# Allegro board hfplink.brd
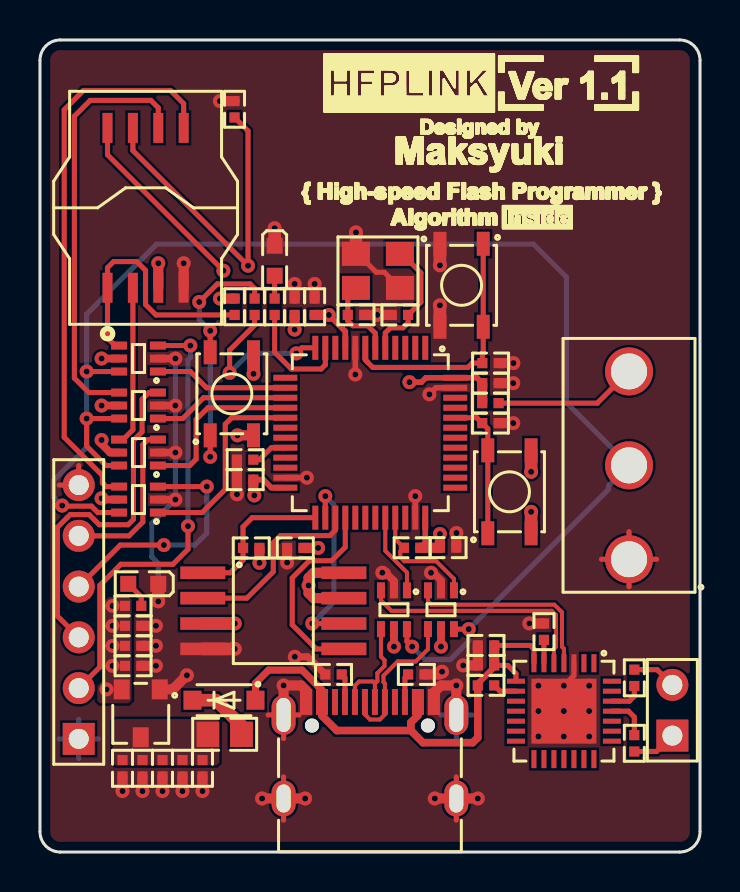
[diagram p0: board, top side]
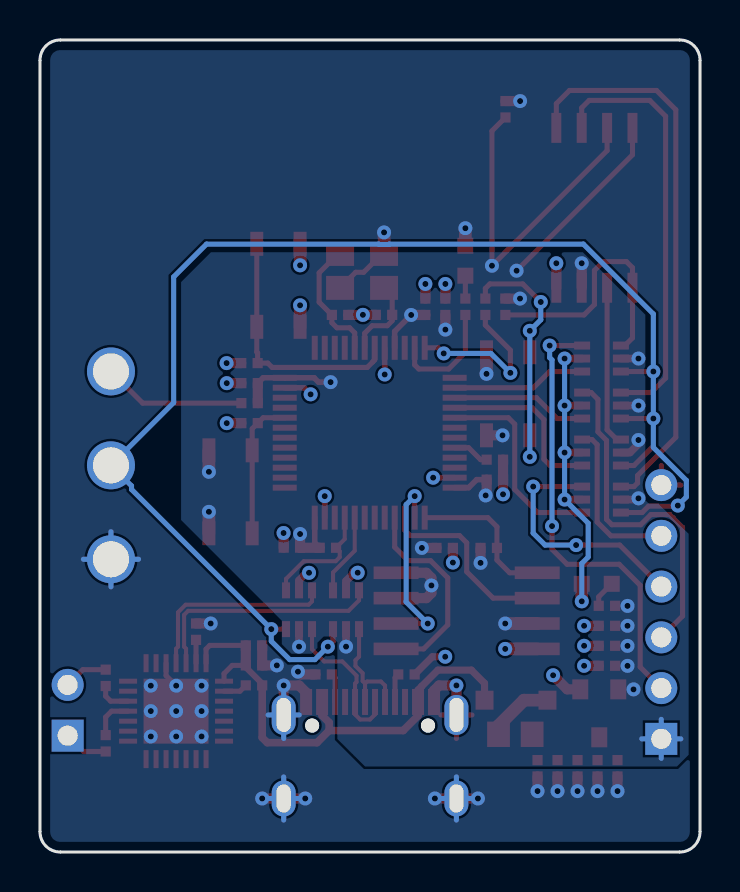
[diagram p1: board, bottom side, seen from below]

Outline 33.02 x 40.64 mm; copper layers: TOP, BOTTOM. Coordinates in mm from the lower left corner of the outline.
Outline path: 0,39.62 0,1.02 arc(0.3,0.3) 1.02,0 32,0 arc(32.72,0.3) 33.02,1.02 33.02,39.62 arc(32.72,40.34) 32,40.64 1.02,40.64 arc(0.3,40.34) 0,39.62

## Design rules (mm)
net group ALL_DP: nets DN DP
net group UART_DP: nets UART_DN UART_DP
net group USB_DP: nets USB_DN USB_DP

## Placement (name value [footprint] x y rotation side)
C1  100nF  [C0402]  22.53 23.47 180 top
C2  10pF  [C0402]  18.01 26.88 180 top
C3  100nF  [C0402]  20.42 15.23 180 top
C4  100nF  [C0402]  22.31 10.34 180 top
C5  1uF  [C0402]  22.31 9.34 180 top
C6  10pF  [C0402]  15.81 26.88 0 top
C7  4.7uF  [C0402]  13.74 27.29 270 top
C8  10uF  [C0402]  7.13 4.19 270 top
C9  10uF  [C0402]  8.13 4.19 270 top
C10  100nF  [C0402]  5.13 4.19 270 top
C11  100nF  [C0402]  6.13 4.19 270 top
C12  100nF  [C0402]  12.74 27.29 90 top
C13  100nF  [C0402]  25.21 11.03 90 top
C14  100nF  [C0402]  10.26 18.64 0 top
C15  10uF  [C0402]  4.13 4.19 270 top
C16  10uF  [C0402]  4.66 9.32 0 top
C17  10uF  [C0402]  4.66 10.32 0 top
C18  100nF  [C0402]  4.66 11.32 0 top
C19  100nF  [C0402]  9.73 37.17 90 top
C20  100nF  [C0402]  12.77 15.22 180 top
C21  100nF  [C0402]  22.54 24.47 0 top
D1  1N5819  [SOD-123-0R95X0R90]  9.21 7.6 180 top
F1  0805L110SLYR_005  [L0805]  9.24 5.89 180 top
J1  USB_TYPEC  [USB-TYPEC-12-SM]  16.51 5.09 0 top
J2  UART  [HDR2X1-2R54-TM-VM]  31.64 5.82 90 top
J3  USER_FLASH  [HDR6X1-2R54-TM-VM]  1.94 5.66 90 top
J4  ACA-SPI-004-K02  [ACA-SPI-004-K02-SM]  5.28 32.24 180 top
LED1  BLUE  [LED0603]  11.74 29.59 270 top
LED2  RED  [LED0603]  5.17 13.42 180 top
R1  5.1K  [R0402]  14.69 8.89 0 top
R2  5.1K  [R0402]  18.83 8.89 0 top
R3  1.5K  [R0402]  18.62 15.23 0 top
R4  0R  [R0402]  29.73 5.44 270 top
R5  0R  [R0402]  29.73 8.72 90 top
R6  2K  [R0402]  11.74 27.29 270 top
R7  4.7K  [R0402]  22.31 8.34 0 top
R8  2K  [R0402]  4.66 12.32 0 top
R9  10K  [R0402]  10.26 19.64 180 top
R10  2K  [R0402]  22.53 22.47 0 top
R11  10K  [R0402]  9.74 27.29 270 top
R12  10K  [R0402]  10.57 15.22 180 top
R13  10K  [R0402]  22.53 21.46 0 top
R14  330R  [R0402]  10.74 27.29 90 top
SW1  STATE-SWITCH  [SW-3-12R7X6R6]  29.47 19.35 180 top
SW2  RESET  [SW-4-1R20X0R65-SM]  21.09 28.36 270 top
SW3  BOOT  [SW-4-1R20X0R65-SM]  23.49 18.03 90 top
SW4  USER  [SW-4-1R20X0R65-SM]  9.6 22.93 90 top
U1  CP2102  [QFN-28-0R90X0R25]  26.21 7.05 270 top
U2  STM/CH32V103C8T6  [LQFP-48-1R20X0R30]  16.52 20.98 180 top
U3  XC6206P332MR  [SOT-23-3-1R00X0R80]  5.04 6.94 270 top
U4  W25Q128JVSIQ  [SOIC-8-2R25X0R63]  11.67 12.07 270 top
U5  WAS3157B  [SOT-363-6-0R80X0R40]  20.06 12.13 180 top
U6  WAS3157B  [SOT-363-6-0R80X0R40]  17.71 12.13 180 top
U7  WAS3157B  [SOT-363-6-0R80X0R40]  4.93 24.7 90 top
U8  WAS3157B  [SOT-363-6-0R80X0R40]  4.93 22.34 90 top
U9  WAS3157B  [SOT-363-6-0R80X0R40]  4.93 17.64 90 top
U10  WAS3157B  [SOT-363-6-0R80X0R40]  4.93 19.99 90 top
X1  8MHz 10pF 10ppm  [XTAL-4-3R20X2R50-SM]  16.91 29.08 180 top

## Library data of the parts
C1-C21 = CAPACITOR-NON-POL
D1 = 1N5819
F1 = FUSE
J1 = USB_TYPEC
J2 = HEADER-2X1
J3 = HEADER-6X1
J4 = ACA-SPI-004-K02
LED1 LED2 = LED
R1-R14 = RESISTOR
SW1 = SW-SLIDE-SPDT
SW2-SW4 = SW-KEY-4
U1 = CP2102
U2 = STM/CH32F103C8T6
U3 = XC6206P332MR
U4 = W25Q128JVSIQ
U5-U10 = WAS3157B
X1 = XTAL-CRY-4

## Footprints (pads in the part's own frame, mm; a bottom-side part is the same pattern mirrored in y, then rotated)
ACA-SPI-004-K02-SM
  rect 0.5x1.5 smd: 1(1.905,4) 2(0.635,4) 3(-0.635,4) 4(-1.905,4) 5(-1.905,-4) 6(-0.635,-4) 7(0.635,-4) 8(1.905,-4)
C0402
  rect 0.51x0.51 smd: 1(-0.41,0) 2(0.41,0)
HDR2X1-2R54-TM-VM
  rect 1.6x1.6 hole 1: 1(0,0)
  round 1.6 hole 1: 2(2.54,0)
HDR6X1-2R54-TM-VM
  rect 1.6x1.6 hole 1: 1(0,0)
  round 1.6 hole 1: 2(2.54,0) 3(5.08,0) 4(7.62,0) 5(10.16,0) 6(12.7,0)
L0805
  rect 1.14x1.27 smd: 1(-0.84,0) 2(0.84,0)
LED0603
  rect 0.8x0.8 smd: 1(0.75,0) 2(-0.75,0)
LQFP-48-1R20X0R30
  rect 0.3x1.2 smd: 1(-2.75,-4.25) 2(-2.25,-4.25) 3(-1.75,-4.25) 4(-1.25,-4.25) 5(-0.75,-4.25) 6(-0.25,-4.25) 7(0.25,-4.25) 8(0.75,-4.25) 9(1.25,-4.25) 10(1.75,-4.25) 11(2.25,-4.25) 12(2.75,-4.25) 25(2.75,4.25) 26(2.25,4.25) 27(1.75,4.25) 28(1.25,4.25) 29(0.75,4.25) 30(0.25,4.25) 31(-0.25,4.25) 32(-0.75,4.25) 33(-1.25,4.25) 34(-1.75,4.25) 35(-2.25,4.25) 36(-2.75,4.25)
  rect 1.2x0.3 smd: 13(4.25,-2.75) 14(4.25,-2.25) 15(4.25,-1.75) 16(4.25,-1.25) 17(4.25,-0.75) 18(4.25,-0.25) 19(4.25,0.25) 20(4.25,0.75) 21(4.25,1.25) 22(4.25,1.75) 23(4.25,2.25) 24(4.25,2.75) 37(-4.25,2.75) 38(-4.25,2.25) 39(-4.25,1.75) 40(-4.25,1.25) 41(-4.25,0.75) 42(-4.25,0.25) 43(-4.25,-0.25) 44(-4.25,-0.75) 45(-4.25,-1.25) 46(-4.25,-1.75) 47(-4.25,-2.25) 48(-4.25,-2.75)
QFN-28-0R90X0R25
  rect 0.9x0.25 smd: 1(-2.4,1.5) 2(-2.4,1) 3(-2.4,0.5) 4(-2.4,0) 5(-2.4,-0.5) 6(-2.4,-1) 7(-2.4,-1.5) 15(2.4,-1.5) 16(2.4,-1) 17(2.4,-0.5) 18(2.4,0) 19(2.4,0.5) 20(2.4,1) 21(2.4,1.5)
  rect 0.25x0.9 smd: 8(-1.5,-2.4) 9(-1,-2.4) 10(-0.5,-2.4) 11(0,-2.4) 12(0.5,-2.4) 13(1,-2.4) 14(1.5,-2.4) 22(1.5,2.4) 23(1,2.4) 24(0.5,2.4) 25(0,2.4) 26(-0.5,2.4) 27(-1,2.4) 28(-1.5,2.4)
  rect 3.25x3.25 smd: 29(0,0)
R0402
  rect 0.51x0.51 smd: 1(-0.41,0) 2(0.41,0)
SOD-123-0R95X0R90
  rect 0.9x0.95 smd: 1(-1.575,0) 2(1.575,0)
SOIC-8-2R25X0R63
  rect 0.63x2.25 smd: 1(-1.905,-3.53) 2(-0.635,-3.53) 3(0.635,-3.53) 4(1.905,-3.53) 5(1.905,3.53) 6(0.635,3.53) 7(-0.635,3.53) 8(-1.905,3.53)
SOT-23-3-1R00X0R80
  rect 1x0.8 smd: 1(-1.2,0.95) 2(-1.2,-0.95) 3(1.2,0)
SOT-363-6-0R80X0R40
  rect 0.4x0.8 smd: 1(-0.65,-0.97) 2(0,-0.97) 3(0.65,-0.97) 4(0.65,0.97) 5(0,0.97) 6(-0.65,0.97)
SW-3-12R7X6R6
  round 2.4 hole 1.8: 1(0,4.7) 2(0,0) 3(0,-4.7)
SW-4-1R20X0R65-SM
  rect 1.2x0.65 smd: 1(-2.078,1.083) 2(2.077,1.083) 3(-2.078,-1.083) 4(2.077,-1.083)
USB-TYPEC-12-SM
  oval 1.2x2 hole 0.7x1.7: 1(-4.32,1.765) 2(4.32,1.765)
  oval 1.2x1.8 hole 0.7x1.4: 3(-4.32,-2.415) 4(4.32,-2.415)
  round 0.71 hole 0.7: 5(-2.9,1.235) 6(2.9,1.235)
  rect 0.6x1.3 smd: A1B12(-3.2,2.415) A4B9(-2.4,2.415) B1A12(3.2,2.415) B4A9(2.4,2.415)
  rect 0.3x1.3 smd: A5(-1.25,2.415) A6(-0.25,2.415) A7(0.25,2.415) A8(1.25,2.415) B5(1.75,2.415) B6(0.75,2.415) B7(-0.75,2.415) B8(-1.75,2.415)
XTAL-4-3R20X2R50-SM
  rect 1.4x1.2 smd: 1(-1.1,-0.85) 2(1.1,-0.85) 3(1.1,0.85) 4(-1.1,0.85)

## Nets
GND: C1.1 C2.2 C3.1 C4.2 C5.2 C6.2 C7.1 C8.2 C9.2 C10.2 C11.2 C12.2 C13.2 C14.1 C15.2 C16.2 C17.2 C18.2 C19.2 C20.2 C21.2 J1.1(EP1) J1.2(EP2) J1.3(EP3) J1.4(EP4) J1.A1B12(GND#A1B12) J1.B1A12(GND#B1A12) J3.6 J4.4(GND) LED1.2 LED2.2 R1.1 R2.2 R9.2 R13.2 SW1.1 SW2.3 SW2.4 U1.3(GND#3) U1.29(GND#29) U2.8(VSSA) U2.23(VSS_1) U2.35(VSS_2) U2.47(VSS_3) U3.1(VSS) U4.4(GND) U5.2(GND) U6.2(GND) U7.2(GND) U8.2(GND) U9.2(GND) U10.2(GND) X1.2(GND#2) X1.4(GND#4)
VBUS: C4.1 C5.1 D1.1 J1.A4B9(VBUS#A4B9) J1.B4A9(VBUS#B4A9) R7.1 U1.7(REGIN) U1.8(VBUS)
VCC_3V3: C1.2 C3.2 C7.2 C12.1 C14.2 C16.1 C17.1 C18.1 C19.1 C20.1 J3.1 J4.3(WP#) J4.7(HOLD#) J4.8(VCC) R3.2 R8.1 R10.1 R11.1 R12.1 SW3.3 SW3.4 SW4.3 SW4.4 U2.9(VDDA) U2.24(VDD_1) U2.36(VDD_2) U2.48(VDD_3) U3.2(VOUT) U4.3(W\P\) U4.7(H\O\L\D\) U4.8(VCC) U5.5(VCC) U6.5(VCC) U7.5(VCC) U8.5(VCC) U9.5(VCC) U10.5(VCC)
VCC_5V: C8.1 C9.1 C10.1 C11.1 C15.1 F1.2 U3.3(VIN)
BOOT0: R13.1 SW3.1 SW3.2 U2.44(BOOT0)
DN: J1.A7(DN1) J1.B7(DN2) U6.4(A)
DP: J1.A6(DP1) J1.B6(DP2) U5.4(A)
FLASH_CLK: J4.6(CLK) U8.4(A)
FLASH_CS: J4.1(CS#) R11.2 U7.4(A)
FLASH_MISO: J4.2(DO) U10.4(A)
FLASH_MOSI: J4.5(DIO) U9.4(A)
NRST: C21.1 SW2.1 SW2.2 U2.7(NRST)
PA2: R14.1 U2.12(PA2)
SPI1_CLK: U2.15(PA5) U8.1(B1)
SPI1_CS: U2.14(PA4) U7.1(B1)
SPI1_MISO: U2.16(PA6) U10.1(B1)
SPI1_MOSI: U2.17(PA7) U9.1(B1)
SPI2_CLK: U2.26(PB13) U4.6(CLK)
SPI2_CS: R12.2 U2.25(PB12) U4.1(C\S\)
SPI2_MISO: U2.27(PB14) U4.2(DO)
SPI2_MOSI: U2.28(PB15) U4.5(DI)
SW_SEL: SW1.2 U5.6(SEL) U6.6(SEL) U7.6(SEL) U8.6(SEL) U9.6(SEL) U10.6(SEL)
UART_DN: U1.5(D-) U6.3(B0)
UART_DP: U1.4(D+) U5.3(B0)
USB_DN: U2.32(PA11) U6.1(B1)
USB_DP: R3.1 U2.33(PA12) U5.1(B1)
USER_CLK: J3.3 U8.3(B0)
USER_CS: J3.2 U7.3(B0)
USER_MISO: J3.5 U10.3(B0)
USER_MOSI: J3.4 U9.3(B0)
N04691: LED1.1 R6.1
N11046: R6.2 U2.11(PA1)
N0022019: R9.1 U2.20(PB2)
N23067: LED2.1 R8.2
N26605: C6.1 U2.6(PD1-OSC_OUT) X1.3(OUT2)
N26609: C2.1 U2.5(PD0-OSC_IN) X1.1(OUT1)
N34328: R14.2 SW4.1 SW4.2
N37113: D1.2 F1.1
N342225: R7.2 U1.9(R\S\T\)
N342233: R4.1 U1.25(RXD)
N342253: J2.1 R4.2
N342259: J2.2 R5.2
N342329: R5.1 U1.26(TXD)
N342481: C13.1 U1.6(VDD)
N356557: R10.2 SW1.3
N382768: J1.A5(CC1) R1.2
N382998: J1.B5(CC2) R2.1

Pads without a net: J1 5 6 A8 B8; U1 1 2 10 11 12 13 14 15 16 17 18 19 20 21 22 23 24 27 28; U2 1 2 3 4 10 13 18 19 21 22 29 30 31 34 37 38 39 40 41 42 43 45 46

## Via types
v1: diameter 0.7, hole 0.305, TOP to BOTTOM, 99 vias

## Routing (per net, layer and track width the routed paths; a pad name or vN(x,y) marks a point on that pad's centre or on a via; arc(x,y) is an arc through that point)
GND: length 99.6
  TOP w0.254: U1.3 26.71,8.83 v1(26.21,8.32) ; 12.19,3.76 J1.3 12.19,1.6 ; SW1.1 29.47,16.03 ; SW1.1 28.09,14.65 ; SW1.1 29.47,13.27 ; SW1.1 30.85,14.65 ; 11.41,6.86 J1.1 ; J1.1 12.19,5.68 ; J1.1 12.97,6.86 ; X1.4 17.23,29.01 16.83,29.01 15.91,29.93 ; 0.96,18.36 J3.6 1.94,19.34 ; 20.83,1.6 J1.4 20.83,3.76
  TOP w0.279: U2.23 v1(13.35,18.73) ; U2.47 19.81,23.23 v1(19.48,22.91) ; U2.8 v1(15.77,23.9) ; U2.35 v1(18.77,17.81)
  TOP w0.356: R1.1 13.39,9.77 v1(12.75,9.77)
  TOP w0.381: U7.2 v1(6.78,24.7) ; U6.2 17.71,13.57 17.3,13.98 ; U8.2 v1(6.78,22.34) ; 20.83,15.96 v1(20.83,15.97) ; U10.2 v1(6.78,19.99) ; U9.2 v1(6.78,17.64) ; v1(19.56,13.98) 19.68,13.98 20.06,13.59 U5.2
  TOP w0.508: C12.2 v1(12.74,28.43) ; 17.3,13.98 v1(17.13,13.98) ; R9.2 C14.1 v1(9.85,17.9) ; v1(7.35,8.85) 6.64,8.14 U3.1 ; C20.2 v1(12.36,14.49) ; J1.2 v1(20.83,8.34) 20.06,8.34 19.71,7.98 J1.B1A12 ; C2.2 16.87,26.88 ; C16.2 v1(5.8,9.32) ; C8.2 v1(7.13,3.05) ; v1(13.26,2.68) J1.3 v1(11.11,2.68) ; C3.1 20.83,15.96 ; C15.2 v1(4.13,3.05) ; C21.2 v1(23.68,24.47) ; J4.4 v1(7.19,29.47) ; C11.2 v1(6.13,3.05) ; v1(21.17,9.34) C5.2 C4.2 ; C7.1 v1(13.74,28.43) ; C17.2 v1(5.8,10.32) ; J1.1 v1(12.19,8.34) 13.05,8.34 13.31,8.08 J1.A1B12 ; C10.2 v1(5.13,3.05) ; R13.2 v1(23.68,21.46) ; 15.91,29.93 X1.2 ; C1.1 v1(23.68,23.47) ; v1(21.9,2.68) J1.4 v1(19.75,2.68) ; C9.2 v1(8.13,3.05) ; C18.2 v1(5.8,11.32) ; R2.2 19.98,8.89 v1(20.11,9.03) ; C19.2 v1(9,37.58) ; C13.2 v1(24.48,11.44) ; C6.2 v1(16.87,26.88)
  TOP w0.635: SW2.4 v1(20.01,27.36) ; X1.2 v1(15.81,31.01) ; LED2.2 v1(5.92,12.55) ; SW2.3 v1(20.01,29.36) ; LED1.2 v1(11.74,31.22) ; 16.87,26.88 v1(16.87,26.88) ; U4.4 v1(9.75,10.17)
  BOTTOM w0.254: SW1.1 30.85,14.65 ; SW1.1 29.47,16.03 ; SW1.1 28.09,14.65 ; SW1.1 29.47,13.27 ; 20.05,2.68 J1.4 ; J1.4 20.83,3.76 ; J1.4 21.61,2.68 ; J1.4 20.83,1.6 ; v1(5.92,12.55) 5.92,14.44 5.59,14.76 5.59,16.46 v1(6.78,17.64) v1(6.78,19.99) v1(6.78,22.34) v1(6.78,24.7) ; J1.3 12.19,3.76 ; J1.3 12.97,2.68 ; J1.3 12.19,1.6 ; J1.3 11.41,2.68 ; 20.05,6.86 J1.2 ; J1.2 21.61,6.86 ; J1.2 20.83,8.04 ; J1.2 20.83,5.68
  vias: v1(24.94,8.32) v1(24.94,7.05) v1(24.94,5.78) v1(26.21,7.05) v1(26.21,5.78) v1(27.48,8.32) v1(27.48,7.05) v1(27.48,5.78)
VBUS: length 25.5
  TOP w0.254: U1.7 24.71,10.15 24.53,10.34 C4.1 ; U1.8 23.81,8.93 23.4,9.34 C5.1
  TOP w0.305: R7.1 21.9,8.43 22.72,9.25 C5.1
  TOP w0.356: D1.1 10.78,8.45 11.44,9.11 13.11,9.11 13.93,8.29 13.93,8.29 14.11,8.11 J1.A4B9
  TOP w0.381: 18.55,6.08 18.55,6.48 18.91,6.84 J1.B4A9 ; 18.55,6.08 19.16,5.47 21.65,5.47 21.9,5.73 R7.1 ; 18.55,6.08 14.85,6.08 14.11,6.82 J1.A4B9
  TOP w0.508: C4.1 C5.1
VCC_3V3: length 63.8
  TOP w0.254: C19.1 10.41,36.09 v1(10.41,29.34) 4.65,35.1 J4.7 ; J4.8 3.38,34.89 v1(9.18,29.09)
  TOP w0.279: R3.2 19.27,15.47 U2.36 ; v1(18.48,23.52) 19.09,23.52 19.3,23.73 U2.48 21.85,23.73 C1.2 ; U2.24 11.58,18.23 11.17,18.64 C14.2 ; U2.9 15.27,26.05 v1(14.45,26.88)
  TOP w0.381: v1(3.08,20.62) 3.08,20.42 3.51,19.99 U10.5 ; U8.5 v1(3.08,22.34) ; U6.5 v1(17.71,10.28) ; U9.5 3.14,17.64 v1(3.08,17.7) ; U5.5 v1(20.06,10.28) ; U7.5 v1(3.08,24.7)
  TOP w0.508: C1.2 R10.1 ; C20.1 v1(13.92,15.22) ; U4.8 13.69,13.98 13.44,13.72 v1(13.44,13.34) 13.44,12.96 13.69,12.71 U4.7 ; v1(20.01,15.91) C3.2 20,15.23 R3.2 ; J4.3 v1(5.92,29.47) ; C7.2 v1(14.45,26.88) ; C12.1 v1(12.74,26.15) ; v1(10.72,17.85) 10.67,17.89 C14.2 ; R11.1 v1(9.01,27.7) ; SW4.3 v1(9.88,20.85) ; R12.1 v1(10.98,14.47)
  TOP w0.635: SW3.4 v1(24.57,19.03) ; U4.3 v1(9.75,11.44) ; SW3.3 v1(24.57,17.03) ; SW4.4 v1(10.68,23.93)
  BOTTOM w0.254: 1.94,4.69 J3.1 ; J3.1 2.92,5.66 ; J3.1 0.96,5.66 ; J3.1 1.94,6.64
  vias: v1(3.33,8.14) v1(3.63,12.32) v1(3.63,11.32) v1(3.63,10.32) v1(3.63,9.32)
BOOT0: length 7.1
  TOP w0.254: SW3.1 SW3.2 22.4,21.19 R13.1 21.85,21.73 U2.44
DN: length 5.9
  TOP w0.203: U6.4 17.06,9.78 17.24,9.6 17.24,9.31 16.88,8.95 16.88,8.56 16.76,8.43 ; 16.76,8.43 J1.A7 ; 16.76,8.43 16.66,8.53 15.96,8.53 15.76,8.33 J1.B7
DP: length 7.6
  TOP w0.203: J1.A6 16.26,6.89 16.51,6.63 17,6.63 17.26,6.89 J1.B6 17.26,8.43 17.18,8.51 17.18,8.83 17.89,9.54 18.8,9.54 19.41,10.15 U5.4
FLASH_CLK: length 21.3
  TOP w0.254: J4.6 5.92,37.24 5.55,37.62 2.51,37.62 1.72,36.82 1.72,23.72 2.44,22.99 U8.4
FLASH_CS: length 12.8
  TOP w0.254: R11.2 5.8,26.88 5.28,27.4 5.28,29.11 4.84,29.55 3.68,29.55 3.38,29.24 J4.1 3.38,25.73 3.76,25.35 U7.4
FLASH_MISO: length 8
  TOP w0.254: U10.4 4.16,20.64 4.65,21.13 J4.2
FLASH_MOSI: length 28.2
  TOP w0.254: J4.5 7.19,37.45 6.53,38.11 2.18,38.11 1.21,37.15 1.21,20.76 3.12,18.84 3.12,18.47 3.3,18.29 U9.4
NRST: length 12.7
  TOP w0.254: SW2.1 SW2.2 22.17,25.02 22.13,24.98 C21.1 21.62,24.47 21.41,24.25 16.65,24.25 16.37,24.53 16.37,24.53 16.27,24.63 U2.7
PA2: length 8.2
  TOP w0.254: U2.12 13.1,25.23 v1(12.82,24.95) ; R14.1 10.74,26.37 9.49,25.12 v1(9.49,23.98)
  BOTTOM w0.254: v1(9.49,23.98) 10.46,24.95 v1(12.82,24.95)
SPI1_CLK: length 6.8
  TOP w0.254: U8.1 7.14,21.69 8.18,22.73 U2.15
SPI1_CS: length 6.7
  TOP w0.254: U7.1 7.52,24.05 8.33,23.23 U2.14
SPI1_MISO: length 8.7
  TOP w0.254: U10.1 7.49,19.34 7.81,19.66 7.81,21.64 8.4,22.23 U2.16
SPI1_MOSI: length 10.3
  TOP w0.254: U9.1 8.11,16.99 9.27,18.15 9.27,21.41 9.59,21.73 U2.17
SPI2_CLK: length 9.7
  TOP w0.254: U4.6 v1(13.62,11.44) ; U2.26 v1(14.27,17.81)
  BOTTOM w0.254: v1(13.62,11.44) 14.7,12.52 14.7,17.38 v1(14.27,17.81)
SPI2_CS: length 7.7
  TOP w0.254: U4.1 9.52,13.98 10.16,14.61 R12.2 10.16,16.28 10.61,16.73 U2.25
SPI2_MISO: length 9.5
  TOP w0.254: U4.2 10.35,12.71 11.67,14.03 11.67,15.47 12.03,15.84 14.51,15.84 14.77,16.1 U2.27
SPI2_MOSI: length 10.2
  TOP w0.254: U4.5 13.83,10.17 12.62,11.37 12.62,13.72 13.48,14.58 14.59,14.58 15.27,15.26 U2.28
SW_SEL: length 74.3
  TOP w0.254: v1(1.11,17.34) 1.14,17.31 2.58,17.31 2.9,16.99 U9.6 ; v1(18.62,10.28) 18.36,10.54 U6.6 ; U8.6 v1(2.33,21.69) 2.33,20.31 3.3,19.34 U10.6 ; U7.6 v1(2.33,24.05) ; v1(21.45,11.16) U5.6
  BOTTOM w0.254: v1(1.11,17.34) 0.68,17.77 0.68,18.6 2.33,20.25 v1(2.33,21.69) v1(2.33,24.05) 2.33,26.92 5.83,30.42 15.54,30.42 15.56,30.41 16.06,30.41 16.07,30.42 24.69,30.42 26.33,28.78 26.33,22.49 SW1.2 28.44,18.32 28.44,18.15 v1(21.45,11.16) 21.45,10.55 20.53,9.63 19.27,9.63 v1(18.62,10.28)
UART_DN: length 12
  TOP w0.203: U1.5 25.71,10.17 25.81,10.27 25.81,11.87 25.61,12.07 17.58,12.07 17.06,12.6 U6.3
UART_DP: length 10.1
  TOP w0.203: U1.4 26.21,10.17 26.12,10.27 26.12,12 25.73,12.38 19.58,12.38 19.41,12.54 U5.3
USB_DN: length 4.1
  TOP w0.203: U2.32 17.27,15.08 18.36,13.99 U6.1
USB_DP: length 5.9
  TOP w0.203: U2.33 17.77,15.66 R3.1 18.02,15.04 18.02,14.76 18.23,14.55 19.82,14.55 20.71,13.67 U5.1
USER_CLK: length 17.5
  TOP w0.254: U8.3 5.45,22.99 5.11,22.65 5.11,21.03 4.68,20.6 4.68,16.65 4.41,16.38 2.97,16.38 2.46,16.89 1.51,16.89 1.36,16.74 1.36,16.74 0.87,16.25 0.87,11.81 J3.3
USER_CS: length 22.6
  TOP w0.254: U7.3 v1(7.52,25.35) ; v1(7.4,16.31) 7.4,15.15 6.65,14.4 4.05,14.4 2.99,13.35 2.99,9.26 J3.2
  BOTTOM w0.254: v1(7.52,25.35) 7.52,24.74 7.4,24.62 v1(7.4,16.31)
USER_MISO: length 8.2
  TOP w0.254: J3.5 4.45,15.82 5.15,16.52 5.15,20.39 5.4,20.64 U10.3
USER_MOSI: length 12.3
  TOP w0.254: J3.4 4.02,15.36 v1(6.2,15.36) ; U9.3 v1(8.35,18.29)
  BOTTOM w0.254: v1(6.2,15.36) 7.75,15.36 8.35,15.96 v1(8.35,18.29)
N04691: length 1.1
  TOP w0.254: LED1.1 R6.1
N11046: length 5.7
  TOP w0.254: R6.2 11.74,25.01 12.58,24.17 14.07,24.17 14.27,24.38 U2.11
N0022019: length 1.8
  TOP w0.254: R9.1 10.98,19.64 11.58,20.23 U2.20
N23067: length 1.4
  TOP w0.254: LED2.1 5.07,12.77 R8.2
N26605: length 4.2
  TOP w0.254: U2.6 16.77,25.96 16.4,26.34 15.65,26.34 15.4,26.59 C6.1 15.4,27.83 X1.3
N26609: length 6.3
  TOP w0.254: X1.1 18.11,29.93 19.05,28.99 19.05,27.52 C2.1 18.42,26.49 18.16,26.24 17.53,26.24 17.27,25.98 U2.5
N34328: length 14
  TOP w0.254: SW4.2 v1(8.52,26.09) ; v1(7.97,27.53) 8.87,28.43 10.52,28.43 10.74,28.21 R14.2 ; 8.52,20.98 SW4.1 v1(8.52,19.78)
  BOTTOM w0.254: v1(8.52,19.78) v1(8.52,26.09) 7.97,26.63 v1(7.97,27.53)
N37113: length 3.4
  TOP w0.635: D1.2 8.81,7.6 10.08,6.33 F1.1
N342225: length 1.2
  TOP w0.254: R7.2 23.01,8.05 U1.9
N342233: length 2.1
  TOP w0.254: U1.25 29.44,7.05 29.73,6.76 R4.1
N342253: length 2.2
  TOP w0.254: R4.2 30.84,5.03 J2.1
N342259: length 2.2
  TOP w0.254: R5.2 30.87,9.13 J2.2
N342329: length 1.7
  TOP w0.254: U1.26 29.48,7.55 29.73,7.8 R5.1
N342481: length 1.2
  TOP w0.254: U1.6 C13.1
N356557: length 7.2
  TOP w0.254: SW1.3 27.88,22.47 R10.2
N382768: length 1.4
  TOP w0.254: R1.2 15.26,8.73 J1.A5
N382998: length 1.4
  TOP w0.254: R2.1 18.26,8.73 J1.B5

## Copper pours and planes (outline as drawn; the poured copper is in the pictures)
GND on TOP: 1.02,0.51 0.66,0.66 0.51,1.02 0.51,39.62 0.66,39.98 1.02,40.13 32,40.13 32.36,39.98 32.51,39.62 32.51,1.02 32.36,0.66 32,0.51 ; 18 cut-outs
GND on BOTTOM: 1.02,0.51 0.66,0.66 0.51,1.02 0.51,39.62 0.66,39.98 1.02,40.13 32,40.13 32.36,39.98 32.51,39.62 32.51,1.02 32.36,0.66 32,0.51 ; 3 cut-outs
VCC_3V3 on TOP: 3.43,12.76 4.44,12.76 4.59,12.61 4.59,7.6 4.43,7.44 2.99,7.44 2.87,7.57 2.87,8.3 3.28,8.71 3.28,12.6
VCC_3V3 on BOTTOM: 2.73,26.89 5.86,30.01 24.47,30.01 25.96,28.52 25.96,16.62 20.92,11.58 20.92,10.4 20.44,9.92 19.43,9.92 19.14,10.21 19.14,10.47 18.83,10.79 18.43,10.79 18.14,10.49 18.14,5.66 16.76,4.28 1.15,4.28 0.57,4.87 0.57,15.92 2.08,17.44 2.57,17.44 2.73,17.6 2.73,17.88 2.74,17.9 2.74,18.83 2.73,18.84
VCC_5V on TOP: 8.83,4.34 3.77,4.34 3.64,4.47 3.64,6.52 3.78,6.65 8.85,6.65 8.97,6.53 8.97,4.48

## Text on the board
NCLEGEND-1-2: FIGURE | SIZE | 12.0 | 27.56 | 39.37 | 70.87 | 55.12x27.56 | 66.93x27.56 | DRILL CHART: TOP to BOTTOM | ALL UNITS ARE IN MILS | PLATED | QTY | 99 | 2 | 8 | 3
